# EAGLE board InkTime_v6 (EAGLE 9.7.0)
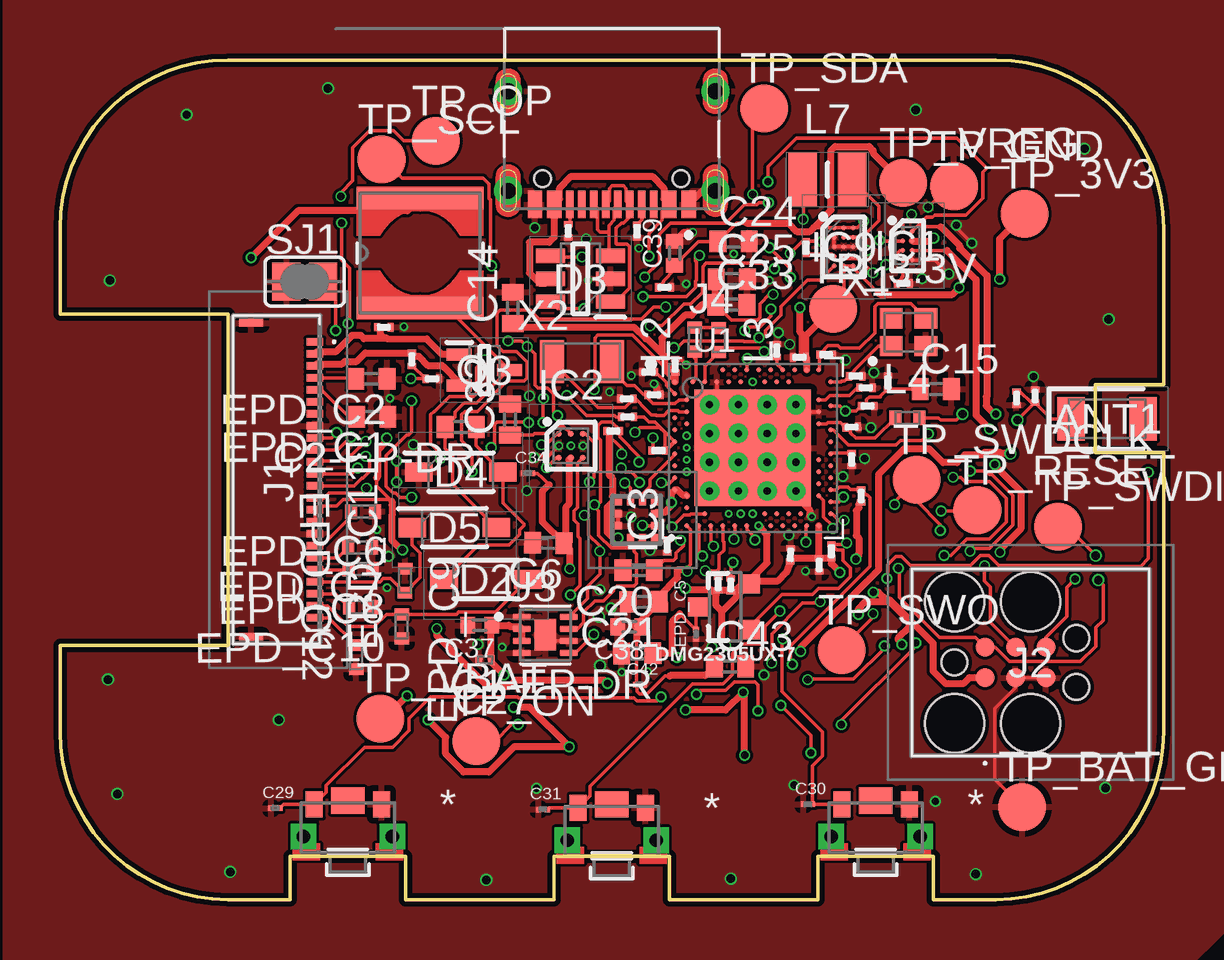
[diagram p0: board, top side]
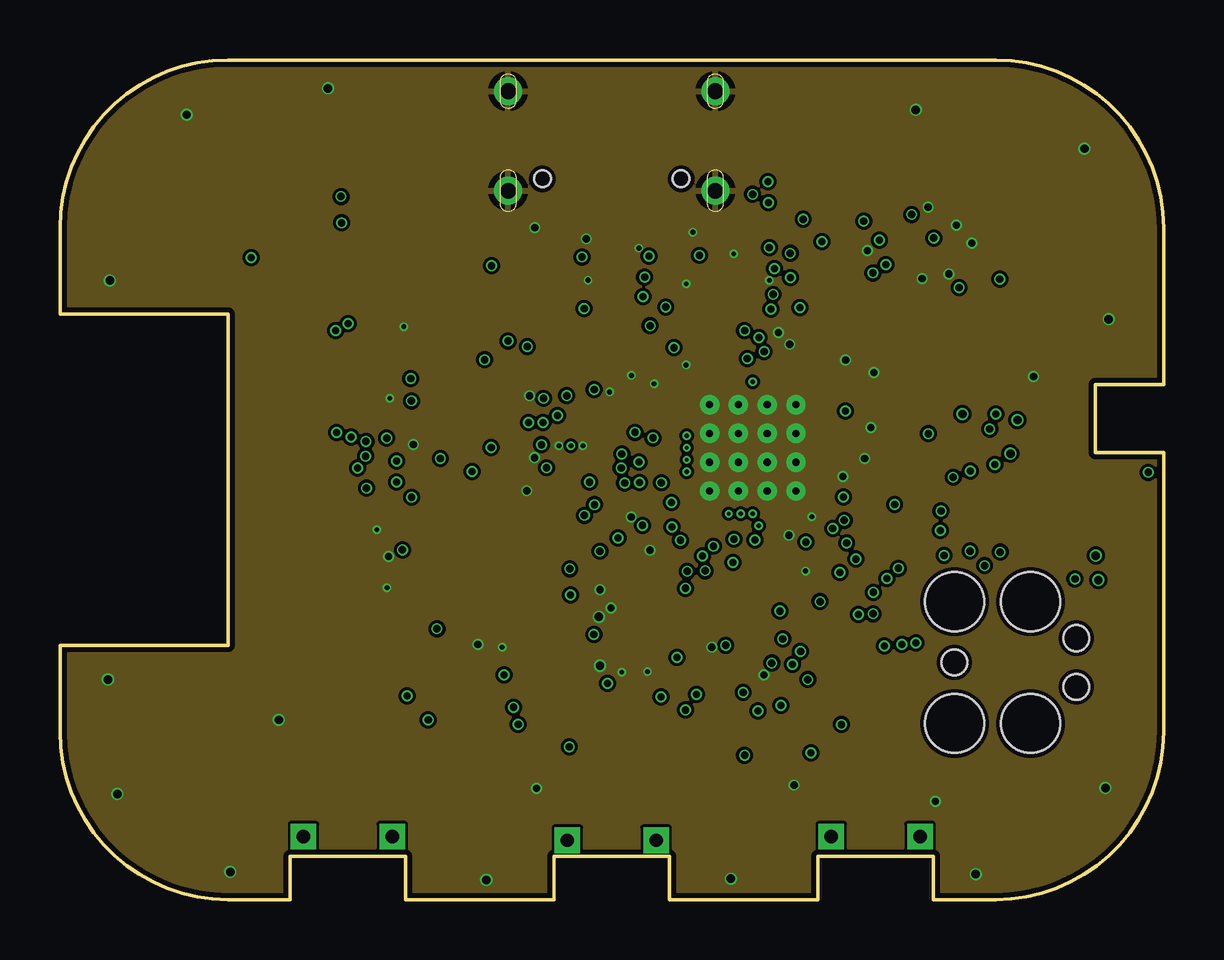
[diagram p1: board, inner layer Route2]
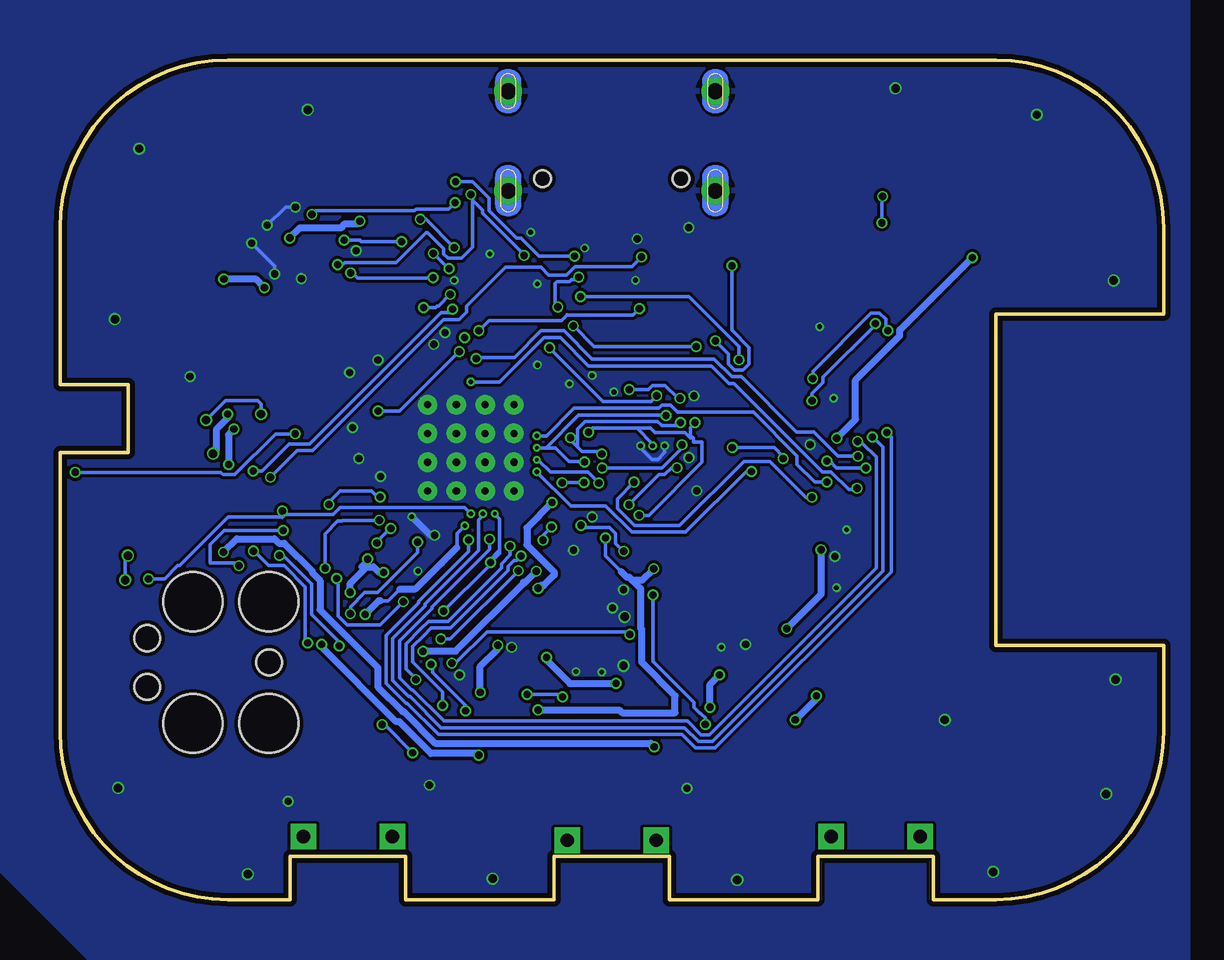
[diagram p2: board, bottom side, seen from below]

Size 46 x 35 mm. Coordinates in mm from the lower left corner, seen from the top.
Outline: 7,35 arc90 0,28 0,24.4 7,24.4 7,10.6 0,10.6 0,7 arc90 7,0 9.6,0 9.6,1.8 14.4,1.8 14.4,0 20.6,0 20.6,1.8 25.4,1.8 25.4,0 31.6,0 31.6,1.8 36.4,1.8 36.4,0 39,0 arc90 46,7 46,18.63 43.15,18.63 43.15,21.46 46,21.46 46,28 arc90 39,35 7,35
Copper layers (1*16): Top 0.035mm / dielectric 1.6mm / Bottom 0.035mm
Design rules "jlcpcb-2layers.dru": minimum track width 5mil, minimum drill 0.3mm, track to track 5mil, track to pad 5mil, pad to pad 5mil, via to via 5mil, smd to smd 5mil, copper to edge 0.2mm, drill to drill 6mil, minimum pad ring 10mil, minimum via ring 3mil, stop-mask expansion 4mil, vias tented up to drill 0mil, thermal gap 10mil

## Footprints (pad centres in the part's own frame; a part is rotated, then mirrored left to right if it is on the bottom)
2450AT18B100E_ANTC3216X140N = smd 1.15 x 1.8: 1 -1.5,0; 2 1.5,0
GRM011R60J152KE01L_1_0201 = smd 0.35 x 0.25: 1 0,0.275; 2 0,-0.275
ESP32_C6_LIBRARY_1_ESP32_WROVER_EAGLE-LTSPICE_C0402 = smd 0.7 x 0.9: 1 -0.65,0; 2 0.65,0
NORDIC_NRF_3_RESC0201_L = smd 0.28 x 0.43: 1 -0.255,0; 2 0.255,0
GRM011R60J152KE01L_2_CAPC0201X13N = smd 0.22 x 0.23: 1 -0.185,0; 2 0.185,0
PERFECT_0402_0402 = smd 0.6 x 0.7: 1 -0.5,0; 2 0.5,0
ESP32_C6_LIBRARY_5_SOD3716X135N = smd 1.15 x 0.8: 1 -1.75,0; 2 1.75,0
ESP32_C6_LIBRARY_3_SOT95P280X145-6N = smd 1.2 x 0.6: 1 -1.25,0.95; 2 -1.25,0; 3 -1.25,-0.95; 4 1.25,-0.95; 5 1.25,0; 6 1.25,0.95
ESP32_C6_LIBRARY_4_ESP32_C6_LIBRARY_4_ESP32_C6_LIBRARY_4_ESP32_C6_LIBRARY_4_ESP32_WROVER_SPARKFUN-DISCRETESEMI_SOT23-3 = smd 0.8 x 0.9: 1 -0.95,-1; 2 0.95,-1; 3 0,1.1
NORDIC_NRF_3_RESC0402_L = smd 0.5 x 0.6: 1 -0.5,0; 2 0.5,0
BQ25180YBGR_BGA8C40P2X4_100X155X50 = smd 0.2 x 0.2: A1 -0.2,0.6; A2 0.2,0.6; B1 -0.2,0.2; B2 0.2,0.2; C1 -0.2,-0.2; C2 0.2,-0.2; D1 -0.2,-0.6; D2 0.2,-0.6
DRV2605YZFR_BGA9C50P3X3_144X144X62 = smd 0.25 x 0.25: A1 -0.5,0.5; A2 0,0.5; A3 0.5,0.5; B1 -0.5,0; B2 0,0; B3 0.5,0; C1 -0.5,-0.5; C2 0,-0.5; C3 0.5,-0.5
BMA423_BMA423 = smd 0.3 x 0.35: 1 -0.75,-0.775; 2 -0.25,-0.775; 3 0.25,-0.775; 4 0.75,-0.775; 7 0.75,0.775; 8 0.25,0.775; 9 -0.25,0.775; 10 -0.75,0.775 | smd 0.35 x 0.3: 5 0.775,-0.25; 6 0.775,0.25; 11 -0.775,0.25; 12 -0.775,-0.25
RT6160AWSC_BGA15C40P3X5_140X230X60 = smd 0.216 x 0.216: A1 -0.4,0.8; A2 0,0.8; A3 0.4,0.8; B1 -0.4,0.4; B2 0,0.4; B3 0.4,0.4; C1 -0.4,0; C2 0,0; C3 0.4,0; D1 -0.4,-0.4; D2 0,-0.4; D3 0.4,-0.4; E1 -0.4,-0.8; E2 0,-0.8; E3 0.4,-0.8
503480-2400_5034802400 = smd 0.3 x 0.7: 1 -5.75,1.525; 2 -5.25,1.525; 3 -4.75,1.525; 4 -4.25,1.525; 5 -3.75,1.525; 6 -3.25,1.525; 7 -2.75,1.525; 8 -2.25,1.525; 9 -1.75,1.525; 10 -1.25,1.525; 11 -0.75,1.525; 12 -0.25,1.525; 13 0.25,1.525; 14 0.75,1.525; 15 1.25,1.525; 16 1.75,1.525; 17 2.25,1.525; 18 2.75,1.525; 19 3.25,1.525; 20 3.75,1.525; 21 4.25,1.525; 22 4.75,1.525; 23 5.25,1.525; 24 5.75,1.525 | smd 0.3 x 1: MP1 -6.54,-1.125; MP2 6.54,-1.125
TC2030-IDC_TC2030IDC = smd 0.783 x 0.783: 1 -0.953,-0.635; 2 -0.953,0.635; 3 0.317,-0.635; 4 0.317,0.635; 5 1.588,-0.635; 6 1.588,0.635 | hole 2.451: -2.223,-2.54; -2.223,2.54; 0.952,-2.54; 0.952,2.54 | hole 1.067: -2.223,0; 2.857,-1.016; 2.857,1.016
KH-TYPE-C-16P_KINGHELM_KH-TYPE-C-16P = smd 0.6 x 1.15: A1_B12 -3.2,4.725; A4_B9 -2.4,4.725; A9_B4 2.4,4.725; A12_B1 3.2,4.725 | smd 0.3 x 1.15: A5 -1.25,4.725; A6 -0.25,4.725; A7 0.25,4.725; A8 1.25,4.725; B5 1.75,4.725; B6 0.75,4.725; B7 -0.75,4.725; B8 -1.75,4.725 | drill 0.65 pad 1.05: SH1 -4.32,0; SH2 4.32,0; SH3 -4.32,4.15; SH4 4.32,4.15 | hole 0.7: -2.89,3.65; 2.89,3.65
NORDIC_NRF_2_RESC0402_L = smd 0.5 x 0.6: 1 -0.5,0; 2 0.5,0
ESP32_C6_LIBRARY_2_IND_4828-WE-TPC_WRE = smd 0.9 x 5.3: 1 -2.286,0; 2 2.286,0
MLP2016SR47MT0S1_INDC2016X100N = smd 1.2 x 2.2: 1 -1.028,0; 2 1.028,0
ESP32_C6_LIBRARY_6_SOT65P210X110-3N = smd 1.05 x 0.5: 1 -1.05,0.65; 2 -1.05,-0.65; 3 1.05,0
CPF0201D7K68C1_0201 = smd 0.35 x 0.25: 1 0,0.275; 2 0,-0.275
ERA-1AEB3401C_0201 = smd 0.35 x 0.25: 1 0,0.275; 2 0,-0.275
ESP32_C6_LIBRARY_7_JUMPER_SJ = smd 1.168 x 1.6: 1 -0.762,0; 2 0.762,0
2025-10-22_07-23-44_LIBRARY_SW_EVP-AKE31A_PAN = smd 0.711 x 1.092: 1 -1.4,-0.972; 2 1.4,-0.972 | drill 0.559 pad 0.914 square: 3 -1.848,0.381; 4 1.848,0.381 | smd 1.397 x 1.092: 5 0,-1.124
HECTOR_WATCH_1_TP20R = smd 2 x 2: TP 0,0
NORDIC_NRF_4_AQFN50P700X700X85_HS-74N = smd 4.85 x 4.85: P$74 0,0 | drill 0.3 pad 0.6: P$75 -1.8,1.8; P$76 -0.6,1.8; P$77 0.6,1.8; P$78 1.8,1.8; P$79 -1.8,0.6; P$80 -0.6,0.6; P$81 0.6,0.6; P$82 1.8,0.6; P$83 -1.8,-0.6; P$84 -0.6,-0.6; P$85 0.6,-0.6; P$86 1.8,-0.6; P$87 -1.8,-1.8; P$88 -0.6,-1.8; P$89 0.6,-1.8; P$90 1.8,-1.8 | smd 0.2 x 0.2: P$A8 -1.25,3.25; P$A10 -0.75,3.25; P$A12 -0.25,3.25; P$A14 0.25,3.25; P$A16 0.75,3.25; P$A18 1.25,3.25; P$A20 1.75,3.25; P$A22 2.25,3.25; P$A23 2.75,3.25; P$AA24 3.25,-2.25; P$AB2 -2.75,-2.5; P$AC5 -2,-2.75; P$AC9 -1,-2.75; P$AC11 -0.5,-2.75; P$AC13 0,-2.75; P$AC15 0.5,-2.75; P$AC17 1,-2.75; P$AC19 1.5,-2.75; P$AC21 2,-2.75; P$AC24 3.25,-2.75; P$AD2 -2.75,-3.25; P$AD4 -2.25,-3.25; P$AD6 -1.75,-3.25; P$AD8 -1.25,-3.25; P$AD10 -0.75,-3.25; P$AD12 -0.25,-3.25; P$AD14 0.25,-3.25; P$AD16 0.75,-3.25; P$AD18 1.25,-3.25; P$AD20 1.75,-3.25; P$AD22 2.25,-3.25; P$AD23 2.75,-3.25; P$B1 -3.25,2.75; P$B3 -2.5,2.75; P$B5 -2,2.75; P$B7 -1.5,2.75; P$B9 -1,2.75; P$B11 -0.5,2.75; P$B13 0,2.75; P$B15 0.5,2.75; P$B17 1,2.75; P$B19 1.5,2.75; P$B24 3.25,2.75; P$C1 -3.25,2.25; P$D2 -2.75,2; P$D23 2.75,2; P$E24 3.25,1.75; P$F2 -2.75,1.5; P$F23 2.75,1.5; P$G1 -3.25,1.25; P$H2 -2.75,1; P$H23 2.75,1; P$J1 -3.25,0.75; P$J24 3.25,0.75; P$K2 -2.75,0.5; P$L1 -3.25,0.25; P$L24 3.25,0.25; P$M2 -2.75,0; P$N1 -3.25,-0.25; P$N24 3.25,-0.25; P$P2 -2.75,-0.5; P$P23 2.75,-0.5; P$R1 -3.25,-0.75; P$R24 3.25,-0.75; P$T2 -2.75,-1; P$T23 2.75,-1; P$U1 -3.25,-1.25; P$U24 3.25,-1.25; P$V23 2.75,-1.5; P$W1 -3.25,-1.75; P$W24 3.25,-1.75; P$Y2 -2.75,-2; P$Y23 2.75,-2
ESP32_C6_LIBRARY_SON50P200X200X80-9N = smd 0.76 x 0.27: 1 -0.985,0.75; 2 -0.985,0.25; 3 -0.985,-0.25; 4 -0.985,-0.75; 5 0.985,-0.75; 6 0.985,-0.25; 7 0.985,0.25; 8 0.985,0.75 | smd 0.9 x 1.3: 9 0,0
NORDIC_NRF_BT-XTAL_2016_N = smd 0.95 x 0.85: 1 -0.725,-0.575; 2 0.725,-0.575; 3 0.725,0.575; 4 -0.725,0.575
NORDIC_NRF_1_XTAL_3215_N = smd 1 x 1.8: 1 -1.25,0; 2 1.25,0

## Placement (x,y rotation side)
ANT1  2450AT18B100E  [2450AT18B100E_ANTC3216X140N]  43.65,20.04 0 top
C1  12pF  [GRM011R60J152KE01L_1_0201]  33.17,21.82 90 top
C1-EP-DR  10uF  [ESP32_C6_LIBRARY_1_ESP32_WROVER_EAGLE-LTSPICE_C0402]  24.06,10.26 180.2 top
C2  12pF  [GRM011R60J152KE01L_1_0201]  31.94,22.72 90 top
C2-EP-DR  4.7uF/50V  [ESP32_C6_LIBRARY_1_ESP32_WROVER_EAGLE-LTSPICE_C0402]  16.7,19.7 180 top
C3  1pF  [GRM011R60J152KE01L_1_0201]  33,19.7 91.9 top
C4  1pF  [GRM011R60J152KE01L_1_0201]  40.64,20.99 180 top
C5  100nF  [GRM011R60J152KE01L_1_0201]  24.53,21.99 90 top
C6  4.7uF  [ESP32_C6_LIBRARY_1_ESP32_WROVER_EAGLE-LTSPICE_C0402]  20.35,14.87 179.1 top
C7  100nF  [GRM011R60J152KE01L_1_0201]  30.45,14.37 178 top
C8  100nF  [GRM011R60J152KE01L_1_0201]  31.64,13.95 0 top
C9  820pF  [GRM011R60J152KE01L_1_0201]  33,18.35 0 top
C10  N.C  [GRM011R60J152KE01L_1_0201]  33.67,20.57 270 top
C11  100pF  [GRM011R60J152KE01L_1_0201]  33.6,21.34 269.1 top
C12  100nF  [GRM011R60J152KE01L_1_0201]  30.82,22.61 90 top
C13  N.C  [GRM011R60J152KE01L_1_0201]  29.88,22.88 0 top
C14  4.7uF  [ESP32_C6_LIBRARY_1_ESP32_WROVER_EAGLE-LTSPICE_C0402]  18.88,24.66 89.8 top
C15  1.0uF  [ESP32_C6_LIBRARY_1_ESP32_WROVER_EAGLE-LTSPICE_C0402]  36.5,21.28 0 top
C16  47nF  [GRM011R60J152KE01L_1_0201]  34.51,21.56 0 top
C17  12pF  [GRM011R60J152KE01L_1_0201]  24.76,21.05 270 top
C18  12pF  [GRM011R60J152KE01L_1_0201]  23.63,20.88 90 top
C19  100nF  [GRM011R60J152KE01L_1_0201]  25.64,22.25 0 top
C20  4.7uF  [ESP32_C6_LIBRARY_1_ESP32_WROVER_EAGLE-LTSPICE_C0402]  24.12,13.73 180 top
C21  4.7uF  [ESP32_C6_LIBRARY_1_ESP32_WROVER_EAGLE-LTSPICE_C0402]  24.33,12.41 180.5 top
C22  N.C  [GRM011R60J152KE01L_1_0201]  39.87,20.9 0 top
C23  0.1uF  [GRM011R60J152KE01L_1_0201]  25.2,25.52 270 top
C24  10uF  [ESP32_C6_LIBRARY_1_ESP32_WROVER_EAGLE-LTSPICE_C0402]  28.08,27.43 0 top
C25  22uF  [ESP32_C6_LIBRARY_1_ESP32_WROVER_EAGLE-LTSPICE_C0402]  28.01,25.86 0 top
C27  0.1uF  [NORDIC_NRF_3_RESC0201_L]  17.72,9.99 179.6 top
C29  1uF  [GRM011R60J152KE01L_2_CAPC0201X13N]  8.98,3.81 0 top
C30  1uF  [GRM011R60J152KE01L_2_CAPC0201X13N]  31.18,3.97 0 top
C31  1uF  [GRM011R60J152KE01L_2_CAPC0201X13N]  20.13,3.76 0 top
C32  1uF  [ESP32_C6_LIBRARY_1_ESP32_WROVER_EAGLE-LTSPICE_C0402]  18.76,20.01 90 top
C33  22uF  [ESP32_C6_LIBRARY_1_ESP32_WROVER_EAGLE-LTSPICE_C0402]  27.98,24.8 0 top
C34  0.1uF  [GRM011R60J152KE01L_2_CAPC0201X13N]  19.51,17.77 0 top
C37  1uF  [PERFECT_0402_0402]  17.5,11.44 180 top
C38  1uF  [PERFECT_0402_0402]  23.75,11.37 180 top
C39  10uF  [PERFECT_0402_0402]  25.62,26.93 90 top
C42  0.1uF  [GRM011R60J152KE01L_2_CAPC0201X13N]  24.17,8.96 0 top
C43  4.7uF  [ESP32_C6_LIBRARY_1_ESP32_WROVER_EAGLE-LTSPICE_C0402]  27.93,9.72 0 top
D2  MBR0530  [ESP32_C6_LIBRARY_5_SOD3716X135N]  17.76,13.35 0 top
D3  USBLC6-2SC6Y  [ESP32_C6_LIBRARY_3_SOT95P280X145-6N]  21.69,25.88 180 top
D4  MBR0530  [ESP32_C6_LIBRARY_5_SOD3716X135N]  16.71,17.82 0 top
D5  MBR0530  [ESP32_C6_LIBRARY_5_SOD3716X135N]  16.44,15.51 0.2 top
DMG2305UX-7  20V/4.2A/52mΩ/1.4W  [ESP32_C6_LIBRARY_4_ESP32_C6_LIBRARY_4_ESP32_C6_LIBRARY_4_ESP32_C6_LIBRARY_4_ESP32_WROVER_SPARKFUN-DISCRETESEMI_SOT23-3]  27.73,12.2 90 top
EPD_C1  1uF/50V  [ESP32_C6_LIBRARY_1_ESP32_WROVER_EAGLE-LTSPICE_C0402]  13.02,20.13 180 top
EPD_C2  1uF/50V  [ESP32_C6_LIBRARY_1_ESP32_WROVER_EAGLE-LTSPICE_C0402]  12.98,21.7 180 top
EPD_C5  0.1uF/50V  [GRM011R60J152KE01L_2_CAPC0201X13N]  26.51,11.06 90 top
EPD_C6  1uF/50V  [NORDIC_NRF_3_RESC0402_L]  12.63,16.17 180 top
EPD_C7  1uF/50V  [NORDIC_NRF_3_RESC0402_L]  12.5,14.68 180 top
EPD_C8  1uF/50V  [NORDIC_NRF_3_RESC0402_L]  12.53,13.78 180.4 top
EPD_C9  1uF/50V  [NORDIC_NRF_3_RESC0402_L]  14.38,13.29 269.2 top
EPD_C10  1uF/50V  [NORDIC_NRF_3_RESC0402_L]  12.55,12.19 180.6 top
EPD_C11  1uF/50V  [NORDIC_NRF_3_RESC0402_L]  14.25,11.39 90 top
EPD_C12  1uF/50V  [NORDIC_NRF_3_RESC0402_L]  12.34,10.11 90.9 top
IC1  BQ25180YBGR  [BQ25180YBGR_BGA8C40P2X4_100X155X50]  35.33,27.26 0 top
IC2  DRV2605YZFR  [DRV2605YZFR_BGA9C50P3X3_144X144X62]  21.3,18.92 0 top
IC3  BMA423  [BMA423_BMA423]  24.04,15.83 90 top
IC9  RT6160AWSC  [RT6160AWSC_BGA15C40P3X5_140X230X60]  32.67,27.21 0 top
J1  503480-2400  [503480-2400_5034802400]  9.1,17.5 270 top
J2  TC2030-IDC  [TC2030-IDC_TC2030IDC]  39.51,9.88 0 top
J4  KH-TYPE-C-16P  [KH-TYPE-C-16P_KINGHELM_KH-TYPE-C-16P]  23,33.7 180 top
L2  10uH  [NORDIC_NRF_2_RESC0402_L]  26.46,23.34 89.7 top
L3  15nH  [NORDIC_NRF_2_RESC0402_L]  27.46,23.33 270 top
L4  3.9nH  [NORDIC_NRF_2_RESC0402_L]  35.32,20.08 0 top
L5  68uH  [ESP32_C6_LIBRARY_2_IND_4828-WE-TPC_WRE]  15.01,26.95 90 top
L7  FTC252012SR47MBCA  [MLP2016SR47MT0S1_INDC2016X100N]  31.99,30.01 180 top
Q3  SI1308EDL-T1-GE3  [ESP32_C6_LIBRARY_6_SOT65P210X110-3N]  17.69,22.07 0 top
R1_EP_DR  0.47  [CPF0201D7K68C1_0201]  14.66,22.52 180 top
R1_USB  5K1  [CPF0201D7K68C1_0201]  24.05,27.86 180 top
R2  0  [CPF0201D7K68C1_0201]  23.65,20.12 90 top
R2_EP_DR  10K  [CPF0201D7K68C1_0201]  13.5,23.86 269.3 top
R2_USB  5K1  [CPF0201D7K68C1_0201]  21.18,27.87 359.9 top
R3  0  [CPF0201D7K68C1_0201]  25.31,14.73 359.7 top
R4  0  [CPF0201D7K68C1_0201]  31.09,27.18 180 top
R5  10k  [CPF0201D7K68C1_0201]  27.44,13.16 0 top
R7  10k  [CPF0201D7K68C1_0201]  33.39,16.82 0 top
R8  10k  [CPF0201D7K68C1_0201]  27.96,13.12 0 top
R9  10K  [ERA-1AEB3401C_0201]  35.15,25.68 270.2 top
R17  3k3  [CPF0201D7K68C1_0201]  23.06,19.53 90 top
R18  3K3  [CPF0201D7K68C1_0201]  24.94,18.72 90 top
R_PWR_EPD  10K  [CPF0201D7K68C1_0201]  32.16,14.52 0 top
R_TYPE_SEL  2.2  [CPF0201D7K68C1_0201]  15.52,21.71 270.1 top
SJ1  [ESP32_C6_LIBRARY_7_JUMPER_SJ]  10.2,25.76 0 top
SW_DN  2025-10-22_07-23-44_LIBRARY_EVP-AKE31ASW_EVP-AKE31A_PAN  [2025-10-22_07-23-44_LIBRARY_SW_EVP-AKE31A_PAN]  12,3 180 top
SW_ENT  2025-10-22_07-23-44_LIBRARY_EVP-AKE31ASW_EVP-AKE31A_PAN  [2025-10-22_07-23-44_LIBRARY_SW_EVP-AKE31A_PAN]  23,2.85 180 top
SW_UP  2025-10-22_07-23-44_LIBRARY_EVP-AKE31ASW_EVP-AKE31A_PAN  [2025-10-22_07-23-44_LIBRARY_SW_EVP-AKE31A_PAN]  34,3 180 top
TP_3.3V  HECTOR_WATCH_1_TPTP20R  [HECTOR_WATCH_1_TP20R]  32.22,24.63 0 top
TP_3V3  HECTOR_WATCH_1_TPTP20R  [HECTOR_WATCH_1_TP20R]  40.2,28.58 0 top
TP_BAT_GND  HECTOR_WATCH_1_TPTP20R  [HECTOR_WATCH_1_TP20R]  40.11,3.86 0 top
TP_GND  HECTOR_WATCH_1_TPTP20R  [HECTOR_WATCH_1_TP20R]  37.27,29.74 0 top
TP_ON  HECTOR_WATCH_1_TPTP20R  [HECTOR_WATCH_1_TP20R]  17.35,6.6 0 top
TP_OP  HECTOR_WATCH_1_TPTP20R  [HECTOR_WATCH_1_TP20R]  15.66,31.63 0 top
TP_RESET  HECTOR_WATCH_1_TPTP20R  [HECTOR_WATCH_1_TP20R]  38.24,16.23 0 top
TP_SCL  HECTOR_WATCH_1_TPTP20R  [HECTOR_WATCH_1_TP20R]  13.41,30.85 0 top
TP_SDA  HECTOR_WATCH_1_TPTP20R  [HECTOR_WATCH_1_TP20R]  29.35,32.99 0 top
TP_SWDCLK  HECTOR_WATCH_1_TPTP20R  [HECTOR_WATCH_1_TP20R]  35.71,17.51 0 top
TP_SWDIO  HECTOR_WATCH_1_TPTP20R  [HECTOR_WATCH_1_TP20R]  41.6,15.55 0 top
TP_SWO  HECTOR_WATCH_1_TPTP20R  [HECTOR_WATCH_1_TP20R]  32.59,10.4 0 top
TP_VBAT  HECTOR_WATCH_1_TPTP20R  [HECTOR_WATCH_1_TP20R]  13.36,7.55 0 top
TP_VREG  HECTOR_WATCH_1_TPTP20R  [HECTOR_WATCH_1_TP20R]  35.14,29.87 0 top
U1  NRF52840_QF  [NORDIC_NRF_4_AQFN50P700X700X85_HS-74N]  28.88,18.83 0 top
U3  MAX17048G+T10  [ESP32_C6_LIBRARY_SON50P200X200X80-9N]  20.23,11.04 0 top
X1  32Mhz  [NORDIC_NRF_BT-XTAL_2016_N]  35.37,23.65 0 top
X2  32.786kHz  [NORDIC_NRF_1_XTAL_3215_N]  21.75,22.43 0 top

## Library data of the parts
ANT1 = InkTime_v5; ARROW_PART_NUMBER: 2450AT18B100E; ARROW_PRICE-STOCK: https://www.arrow.com/en/products/2450at18b100e/johanson-dielectrics?utm_currency=USD&region=nac; DESCRIPTION: Antennas 2.45GHz ANTENNA; HEIGHT: 1.4mm; MANUFACTURER_NAME: JOHANSON TECHNOLOGY; MANUFACTURER_PART_NUMBER: 2450AT18B100E; MOUSER_PART_NUMBER: 609-2450AT18B100E; MOUSER_PRICE-STOCK: https://www.mouser.co.uk/ProductDetail/Johanson-Technology/2450AT18B100E?qs=yCnrNFeXz%252Bh5MFsFIXGZGA%3D%3D
C1-C5 C7-C13 C16-C19 C22 C23 C27 C37-C39 EPD_C6-EPD_C12 L2-L4 R1_EP_DR R1_USB R2 R2_EP_DR R2_USB R3-R5 R7-R9 R17 R18 R_PWR_EPD R_TYPE_SEL SJ1 TP_3.3V TP_3V3 TP_BAT_GND TP_GND TP_ON TP_OP TP_RESET TP_SCL TP_SDA TP_SWDCLK TP_SWDIO TP_SWO TP_VBAT TP_VREG U1 X1 X2 = InkTime_v5
C1-EP-DR C2-EP-DR C6 C14 C15 C20 C21 C24 C25 C32 C33 C43 EPD_C1 EPD_C2 = InkTime_v5; SPICEMODEL: NONE; SPICEPREFIX: C
C29-C31 C34 C42 EPD_C5 = InkTime_v5; AVAILABILITY: In Stock; CHECK_PRICES: https://www.snapeda.com/parts/GRM011R60J152KE01L/Murata/view-part/?ref=eda; DESCRIPTION: SMD Capacitor X5R(EIA) with Capacitance: 1500pF Tol. 10%. Rated Voltage: 6.3Vdc; MF: Murata; MP: GRM011R60J152KE01L; PACKAGE: 0201 Murata; PRICE: None; SNAPEDA_LINK: https://www.snapeda.com/parts/GRM011R60J152KE01L/Murata/view-part/?ref=snap
D2 D4 D5 = InkTime_v5; AVAILABILITY: In Stock; CHECK_PRICES: https://www.snapeda.com/parts/MBR0530/Onsemi/view-part/?ref=eda; DESCRIPTION: Diode Schottky 30 V 500mA Surface Mount SOD-123; MF: ON Semiconductor; MP: MBR0530; PACKAGE: SOD-123-2 ON Semiconductor; PRICE: None; PURCHASE-URL: https://www.snapeda.com/api/url_track_click_mouser/?unipart_id=179458&manufacturer=ON Semiconductor&part_name=MBR0530&search_term=None; SNAPEDA_LINK: https://www.snapeda.com/parts/MBR0530/Onsemi/view-part/?ref=snap
D3 = InkTime_v5; AVAILABILITY: In Stock; CHECK_PRICES: https://www.snapeda.com/parts/USBLC6-2SC6Y/STMicroelectronics/view-part/?ref=eda; DESCRIPTION: 17V Clamp 5A (8/20µs) Ipp Tvs Diode Surface Mount SOT-23-6; MF: STMicroelectronics; MP: USBLC6-2SC6Y; PACKAGE: SOT-23-6 STMicroelectronics; PRICE: None; SNAPEDA_LINK: https://www.snapeda.com/parts/USBLC6-2SC6Y/STMicroelectronics/view-part/?ref=snap
DMG2305UX-7 = InkTime_v5; PROD_ID: TRAN-14388
IC1 = InkTime_v5; ARROW_PART_NUMBER: BQ25180YBGR; ARROW_PRICE-STOCK: https://www.arrow.com/en/products/bq25180ybgr/texas-instruments?utm_currency=USD&region=nac; DESCRIPTION: Charger IC Lithium Ion/Polymer, Lithium Iron Phosphate 8-DSBGA (1.6x1.1); HEIGHT: 0.5mm; MANUFACTURER_NAME: Texas Instruments; MANUFACTURER_PART_NUMBER: BQ25180YBGR; MOUSER_PART_NUMBER: 595-BQ25180YBGR; MOUSER_PRICE-STOCK: https://www.mouser.co.uk/ProductDetail/Texas-Instruments/BQ25180YBGR?qs=doiCPypUmgEWjAK%252BJAX6Tw%3D%3D
IC2 = InkTime_v5; ARROW_PART_NUMBER: DRV2605YZFR; ARROW_PRICE-STOCK: https://www.arrow.com/en/products/drv2605yzfr/texas-instruments?region=nac; DESCRIPTION: Haptic Driver for ERM/LRA with Built-In Library and Smart Loop Architecture; HEIGHT: 0.625mm; MANUFACTURER_NAME: Texas Instruments; MANUFACTURER_PART_NUMBER: DRV2605YZFR
IC3 = InkTime_v5; ARROW_PART_NUMBER: BMA423; ARROW_PRICE-STOCK: https://www.arrow.com/en/products/bma423/bosch; DESCRIPTION: Accelerometers Triaxial low-g 12bit Acceleration Sensor; HEIGHT: 1mm; MANUFACTURER_NAME: BOSCH; MANUFACTURER_PART_NUMBER: BMA423; MOUSER_PART_NUMBER: 262-BMA423; MOUSER_PRICE-STOCK: https://www.mouser.co.uk/ProductDetail/Bosch-Sensortec/BMA423?qs=HXFqYaX1Q2xC%252BSgeGoX3mg%3D%3D
IC9 = InkTime_v5; DESCRIPTION: Buck-Boost Regulator Positive Output Step-Up/Step-Down I2C DC-DC Controller IC 15-WL-CSP (BSC) (1.4x2.3); HEIGHT: 0.6mm; MANUFACTURER_NAME: RICHTEK; MANUFACTURER_PART_NUMBER: RT6160AWSC; MOUSER_PART_NUMBER: 835-RT6160AWSC; MOUSER_PRICE-STOCK: https://www.mouser.co.uk/ProductDetail/Richtek/RT6160AWSC?qs=amGC7iS6iy%2FLd9PSoixZXQ%3D%3D
J1 = InkTime_v5; DESCRIPTION: FFC & FPC Connectors 0.5mm FPC RA SMT Dual Contact 24Ckt; HEIGHT: 1.87mm; MANUFACTURER_NAME: Molex; MANUFACTURER_PART_NUMBER: 503480-2400; MOUSER_PART_NUMBER: 538-503480-2400; MOUSER_PRICE-STOCK: https://www.mouser.co.uk/ProductDetail/Molex/503480-2400?qs=OAhjpuo3Vu7efIoxFh9AOw%3D%3D
J2 = InkTime_v5; DESCRIPTION: CABLE ADAPTER 6 POS; HEIGHT: 19mm; MANUFACTURER_NAME: Tag Connect; MANUFACTURER_PART_NUMBER: TC2030-IDC
J4 = InkTime_v5; AVAILABILITY: Not in stock; CHECK_PRICES: https://www.snapeda.com/parts/KH-TYPE-C-16P/Kinghelm/view-part/?ref=eda; MF: kinghelm; MP: KH-TYPE-C-16P; PACKAGE: None; PRICE: None; SNAPEDA_LINK: https://www.snapeda.com/parts/KH-TYPE-C-16P/Kinghelm/view-part/?ref=snap
L5 = InkTime_v5; COPYRIGHT: Copyright (C) 2024 Ultra Librarian. All rights reserved.; MANUFACTURER_PART_NUMBER: 744043680; MFR_NAME: Wurth Electronics
L7 = InkTime_v5; DESCRIPTION: SMD / SMT Inductors (Coils), L=0.47?H, L x W x T :; HEIGHT: 1mm; JLCPCB: https://jlcpcb.com/partdetail/6763488-FTC252012SR47MBCA/C5832368; MANUFACTURER_NAME: TDK; MANUFACTURER_PART_NUMBER: FTC252012SR47MBCA
Q3 = InkTime_v5; AVAILABILITY: In Stock; CHECK_PRICES: https://www.snapeda.com/parts/SI1308EDL-T1-GE3/Vishay+Siliconix/view-part/?ref=eda; DESCRIPTION: Si1308EDL-T1-GE3 N-channel MOSFET Transistor, 1.5 A, 30 V, 3-Pin SC-70 | Siliconix / Vishay SI1308EDL-T1-GE3; MF: Vishay Siliconix; MP: SI1308EDL-T1-GE3; PACKAGE: SOT-323 Vishay Semiconductor; PRICE: None; PURCHASE-URL: https://www.snapeda.com/api/url_track_click_mouser/?unipart_id=274603&manufacturer=Vishay Siliconix&part_name=SI1308EDL-T1-GE3&search_term=None; SNAPEDA_LINK: https://www.snapeda.com/parts/SI1308EDL-T1-GE3/Vishay+Siliconix/view-part/?ref=snap
SW_DN SW_ENT SW_UP = InkTime_v5; COPYRIGHT: Copyright (C) 2025 Ultra Librarian. All rights reserved.; DIGI-KEY_PART_NUMBER_1: P123437TR-ND; DIGI-KEY_PART_NUMBER_2: P123437CT-ND; DIGI-KEY_PART_NUMBER_3: P123437DKR-ND; MANUFACTURER_NAME: Panasonic; MANUFACTURER_PART_NUMBER: EVP-AKE31A
U3 = InkTime_v5; AVAILABILITY: In Stock; CHECK_PRICES: https://www.snapeda.com/parts/MAX17048G+T10/Analog+Devices/view-part/?ref=eda; DESCRIPTION: 3µA 1-Cell/2-Cell Fuel Gauge with ModelGauge; MF: Analog Devices; MP: MAX17048G+T10; PACKAGE: TDFN-8 Maxim; PRICE: None; PURCHASE-URL: https://www.snapeda.com/api/url_track_click_mouser/?unipart_id=329239&manufacturer=Analog Devices&part_name=MAX17048G+T10&search_term=None; SNAPEDA_LINK: https://www.snapeda.com/parts/MAX17048G+T10/Analog+Devices/view-part/?ref=snap

## Nets
3V3: C6.1 C7.1 C8.1 C12.2 C14.1 C19.2 C25.1 C33.1 C34.2 DMG2305UX-7.2 IC2.C2 IC3.3 IC3.7 IC3.10 IC9.E2 IC9.E3 J2.1 R5.2 R7.2 R8.2 R17.1 R18.1 R_PWR_EPD.2 TP_3.3V.TP TP_3V3.TP U1.P$A22 U1.P$AD14 U1.P$AD23 U1.P$B1 U1.P$W1 U1.P$Y2
ALERT: U1.P$J24 U3.5
D+: D3.4 U1.P$AD6
D-: D3.6 U1.P$AD4
DN: D3.1 J4.A7 J4.B7
DP: D3.3 J4.A6 J4.B6
EPD_3V3: C1-EP-DR.1 DMG2305UX-7.3 EPD_C5.2 J1.15 J1.16 L5.2
EPD_BUSY: J1.9 U1.P$AD12
EPD_CS: J1.12 U1.P$K2
EPD_DC: J1.11 U1.P$AD10
EPD_RST: J1.10 U1.P$AC11
GDR: J1.2 Q3.1 R2_EP_DR.2
GND: C1-EP-DR.2 C1.2 C2.2 C3.2 C4.2 C5.1 C6.2 C7.2 C8.2 C9.2 C10.1 C11.1 C12.1 C13.1 C14.2 C15.2 C16.1 C17.1 C18.1 C19.1 C20.2 C21.2 C22.2 C23.1 C24.2 C25.2 C27.2 C29.1 C30.1 C31.1 C32.2 C33.2 C34.1 C37.2 C38.2 C39.2 C42.2 C43.2 D3.2 D4.1 EPD_C1.1 EPD_C2.1 EPD_C5.1 EPD_C6.1 EPD_C7.1 EPD_C8.1 EPD_C9.1 EPD_C10.1 EPD_C11.1 EPD_C12.1 IC1.D2 IC2.B1 IC2.B3 IC3.8 IC3.9 IC9.B1 IC9.C1 IC9.C2 IC9.C3 J1.8 J1.17 J1.MP1 J1.MP2 J2.3 J2.5 J4.A1_B12 J4.A12_B1 J4.SH1 J4.SH2 J4.SH3 J4.SH4 R1_USB.1 R2_EP_DR.1 R2_USB.2 R3.2 R9.1 R_TYPE_SEL.1 SJ1.1 SW_DN.1 SW_ENT.1 SW_UP.1 TP_BAT_GND.TP TP_GND.TP U1.P$74 U1.P$75 U1.P$76 U1.P$77 U1.P$78 U1.P$79 U1.P$80 U1.P$81 U1.P$82 U1.P$83 U1.P$84 U1.P$85 U1.P$86 U1.P$87 U1.P$88 U1.P$89 U1.P$90 U1.P$B7 U1.P$F23 U3.1 U3.4 U3.6 U3.9 X1.2
HAPTIC_EN: IC2.A1 U1.P$U1
IMU_INT1: IC3.5 U1.P$N1
IMU_INT2: IC3.6 U1.P$P2
LX1: IC9.B2 IC9.B3 L7.1
LX2: IC9.D2 IC9.D3 L7.2
MOSI: J1.14 U1.P$B13
N$1: L2.2 L3.1
N$2: C32.1 IC2.A2
N$3: IC1.D1 R9.2
N$4: J4.B5 R2_USB.1
N$5: J4.A5 R1_USB.2
N$7: C2-EP-DR.2 D5.2 L5.1 Q3.3
N$8: IC9.E1 R2.1
N$9: IC9.D1 R4.1
N$10: IC3.1 R3.1
N$11: EPD_C2.2 J1.4
N$12: EPD_C1.2 J1.5
N$14: C2-EP-DR.1 D2.1 D4.2
N$16: C9.1 U1.P$N24
N$19: C3.1 L4.1 U1.P$H23
N$20: ANT1.1 C4.1 C22.1 L4.2
N$21: C11.2 U1.P$D23
N$22: C1.1 U1.P$B24 X1.1
N$23: C2.1 U1.P$A23 X1.3
N$24: C10.2 C15.1 C16.2 L3.2 U1.P$B5 U1.P$E24
N$25: EPD_C6.2 J1.18
N$26: EPD_C7.2 J1.19
N$27: EPD_C8.2 J1.20
N$28: C13.2 U1.P$A18
N$29: R1_EP_DR.1 R_TYPE_SEL.2 SJ1.2
N$30: EPD_C10.2 J1.22
N$32: EPD_C12.2 J1.24
N$40: L2.1 U1.P$B3
N$41: C5.2 U1.P$C1
N$42: C17.2 U1.P$D2 X2.2
N$43: C18.2 U1.P$F2 X2.1
N$56: C20.1 U1.P$AC5
OUT+: IC2.A3 TP_OP.TP
OUT-: IC2.C3 TP_ON.TP
P0.04: U1.P$J1
P0.09: U1.P$L24
P0.13: C30.2 R5.1 SW_UP.2 U1.P$AD8
P0.14: C31.2 R8.1 SW_ENT.2 U1.P$AC9
P0.19: U1.P$AC15
P0.20: U1.P$AD16
P0.21: U1.P$AC17
P0.22: U1.P$AD18
P0.23: U1.P$AC19
P0.24: U1.P$AD20
P0.25: U1.P$AC21
P0.26: U1.P$G1
P0.27: U1.P$H2
P0.28: U1.P$B11
P0.29: U1.P$A10
P0.30: U1.P$B9
P0.31: U1.P$A8
P1.01: DMG2305UX-7.1 R_PWR_EPD.1 U1.P$Y23
P1.02: C29.2 R7.1 SW_DN.2 U1.P$W24
P1.03: U1.P$V23
P1.04: U1.P$U24
P1.05: U1.P$T23
P1.06: U1.P$R24
P1.07: U1.P$P23
P1.09: U1.P$R1
P1.10: U1.P$A20
P1.11: U1.P$B19
P1.12: U1.P$B17
P1.13: U1.P$A16
P1.14: U1.P$B15
P1.15: U1.P$A14
PMIC_INT: IC1.A1 U1.P$T2
PREVGH: D5.1 EPD_C9.2 J1.21
PREVGL: D2.2 EPD_C11.2 J1.23
RESE: J1.3 Q3.2 R1_EP_DR.2
RESET: J2.6 TP_RESET.TP U1.P$AC13
S$1: X1.4
SCK: J1.13 U1.P$A12
SCL: IC1.B1 IC2.C1 IC3.12 R4.2 R17.2 TP_SCL.TP U1.P$M2 U3.7
SDA: IC1.C1 IC2.B2 IC3.2 R2.2 R18.2 TP_SDA.TP U1.P$L1 U3.8
SWDCLK: J2.4 TP_SWDCLK.TP U1.P$AA24
SWDIO: J2.2 TP_SWDIO.TP U1.P$AC24
SWO: TP_SWO.TP U1.P$AD22
VBAT: C27.1 C37.1 IC1.C2 TP_VBAT.TP U3.2 U3.3
VBUS: C21.1 C38.1 C42.1 C43.1 D3.5 IC1.A2 J4.A4_B9 J4.A9_B4 U1.P$AD2
VREG: C23.2 C24.1 C39.1 IC1.B2 IC9.A1 IC9.A2 IC9.A3 TP_VREG.TP

## Tracks (layer width: path | path; a pad name or v marks a point on that pad's centre or on a via)
3V3  (via drill 0.2, 0.3)
  Top 0.15: v24.72,19.25 24.72,18.77 R18.1 | v23.42,18.57 23.42,18.8 22.79,19.43 R17.1 | U1.P$B1 25.15,22.06 25.15,22.24 23.86,23.53 22.42,23.53 22.3,23.41 22.3,21.29 v22.27,21.26 | v29.73,25.23 29.58,25.23 29.18,24.83 29.18,24.27 29.06,24.15 27.98,24.15 C33.1 | 32.67,25.08 IC9.E2 IC9.E3 33.07,26.33 34.09,25.31 34.11,25.31 | IC3.7 | 20.39,17.3 20.12,17.57 20.11,17.57 19.91,17.77 C34.2 | v20.15,20.9 20.14,20.88 v20.14,19.89
  Top 0.3: U1.P$B1 25.64,21.59 C19.2 25.49,22.12 25.35,22.12 25.19,22.29 25.19,22.66 25.09,22.77 | C12.2 31.13,22.58 U1.P$A22 | C8.1 31.63,14.24 U1.P$AD23 | C8.1 31.66,14.25 R_PWR_EPD.2 32.16,14 v32.52,13.64 | C8.1 30.44,14.22 C7.1 30.29,13.66 29.9,13.26 28.7,13.26 | U1.P$Y2 26.09,16.87 25.95,16.87 25.74,17.08 U1.P$W1 25.49,16.94 v25.49,16.55 25.49,16.42 25.22,16.15 24.89,16.15 IC3.3 | J2.1 37.9,9.24 37.65,9 36.92,9 36.4,9.51 36.4,10.68 34.6,12.49 34.45,12.49 34.12,12.81 v33.9,12.81 | C25.1 27.33,25.83 C33.1 26.76,24.8 26.32,24.36 26.05,24.36 25.09,23.41 25.09,22.77 | C6.1 20.11,15.75 20.11,17.02 20.39,17.3 | IC3.7 23.03,16.82 23.03,17.57 22.89,17.7 22.89,19.43 R17.1 | U1.P$AD14 29.25,15.46 29.25,15.43 29.48,15.2 29.48,14.04 28.7,13.26 | 28.01,12.84 R8.2 | 28.7,13.26 28.52,13.26 28.11,12.84 28.01,12.84 | 28.01,12.84 27.97,12.89 R5.2 | R7.2 33.35,16.55 33.31,16.5 33.31,16.33 33.19,16.21 33.19,15.18 33.29,15.07 33.29,14.4 33.28,14.39 33.28,14.3 v33.18,14.19 | DMG2305UX-7.2 27.59,12.02 | 25.09,22.77 24.48,23.38 24.42,23.38 23.95,23.85 19.04,23.85 C14.1 | C12.2 31.09,23.5 TP_3.3V.TP 32.67,25.08 | C12.2 30.95,22.76 30.95,23.55 30.84,23.65 v30.84,24.68 | v33.28,11.88 33.28,12.12 33.58,12.42 34.58,12.42 35.38,11.61 35.38,11.35 34.94,10.9 34.94,10.84 35.1,10.68 v35.1,10.64 | v39.17,25.86 39.17,27.55 TP_3V3.TP | v26.07,7.9 27.74,7.9 v28.48,8.64 28.54,8.58 v28.54,6.02 | IC3.10 23.19,15.15 22.97,15.15 22.81,15.31 22.81,16.34 23.06,16.59 IC3.7 | IC2.C2 21.22,18.34 21.22,16.48 21.08,16.34 21.08,14.93 C6.1 | v26.07,12.97 26.13,12.91 27.16,12.91 27.35,12.72 27.35,12.26 27.59,12.02
  Top 0.3: 34.11,25.31 34.19,25.23 37.2,25.23 v37.48,25.51 | 27.59,12.02 27.59,10.82 27.67,10.73 27.67,10.68 v27.75,10.6 | v21.25,13.79 21.25,14.61 C6.1
  Bottom 0.15: U1.P$AD14 29.45,15.26 29.45,14.67 | 30.09,14.03 30.1,14.03 | 24.44,18.87 24.23,18.67 23.52,18.67 v23.42,18.57 | 24.44,18.87 24.77,19.2 v24.72,19.25 | 24.44,18.87 24.44,19.61 24.12,19.93 21.09,19.93 20.91,19.75 20.27,19.75 v20.14,19.89 | v22.27,21.26 21.47,21.26 21.3,21.43 20.77,21.43 20.24,20.9 v20.15,20.9 | 22.6,13.66 23.26,14.32 IC3.10 | 32.65,12.45 32.33,12.45 31.84,12.93 | v30.84,24.68 30.34,24.68 30.28,24.74 30.22,24.74 v29.73,25.23
  Bottom 0.3: 29.45,14.67 30.09,14.03 | 30.1,14.03 31.2,12.93 31.84,12.93 | v28.48,8.64 28.48,9.71 27.75,10.44 v27.75,10.6 | v25.49,16.55 26.54,15.5 26.54,14.79 25.4,13.65 25.4,13.53 25.84,13.09 25.96,13.09 v26.07,12.97 | 32.65,12.45 32.72,12.45 v33.28,11.88 | v37.48,25.51 37.83,25.86 v39.17,25.86 | v26.07,7.9 22.68,7.9 22.57,7.79 20.36,7.79 20.36,8.5 21.75,9.89 21.75,11.26 21.79,11.3 21.79,12.95 22.16,13.32 | 22.16,13.32 22.27,13.43 22.37,13.43 22.6,13.66 | v33.9,12.81 33.9,13.18 33.21,13.87 | v35.1,10.64 35.1,10.53 31.98,7.41 31.85,7.41 30.54,6.09 28.62,6.09 v28.54,6.02 | 33.21,13.87 33.42,13.87 33.18,14.11 v33.18,14.19 | 33.21,13.87 32.93,13.87 32.7,13.64 v32.52,13.64 | 22.16,13.32 21.72,13.32 v21.25,13.79
  other vias: 29.13,15.58 23.26,15.08
ALERT  (via drill 0.3)
  Top 0.15: U1.P$J24 32.25,19.58 32.87,18.95 34.85,18.95 35.03,19.14 35.92,19.14 v36.2,19.42 | v45.37,17.81 45.37,14.21 45.05,13.89 42.98,13.89 42.95,13.92 39.14,13.92 38.72,14.35 38.36,14.35 37.94,13.92 35.45,13.92 35.07,14.3 34.84,14.3 34.52,13.98 34.52,13.65 34.46,13.6 v34.46,13.38 | v31.69,12.42 31.62,12.36 30.95,12.36 29.67,11.07 29.67,10.02 | 29.67,10.02 | v29.67,9.86 29.67,10.02 | v22.25,11.05 v22.25,11.04 21.5,10.29 U3.5
  Bottom 0.15: v36.2,19.42 36.22,19.4 37.02,19.4 38.71,17.71 39.2,17.71 39.3,17.81 v45.37,17.81 | v31.69,12.42 32.65,11.45 34.04,11.45 34.41,11.82 34.41,13.33 v34.46,13.38 | v29.67,9.86 29.6,9.92 29.45,9.92 28.2,11.16 22.4,11.16 22.29,11.05 v22.25,11.05
D+  (via drill 0.3)
  Top 0.15: U1.P$AD6 27.13,14.84 v27.24,14.73 | v21.76,26.79 20.48,26.79 D3.4 | v36.86,14.35 37.13,14.35 37.81,15.03 38.74,15.03 39.44,15.73 39.44,16.73 38.74,17.43 37.72,17.43 37.55,17.6 v37.23,17.6 | v34.36,10.57 34.36,10.47 33.08,9.19 31.19,9.19 v31.17,9.17
  Bottom 0.15: v21.76,26.79 22.16,26.39 24.54,26.39 24.88,26.04 25.63,26.04 25.95,26.37 27.43,26.37 29.05,24.75 29.05,24.5 29.37,24.18 30,24.18 35.47,18.71 36.12,18.71 v37.23,17.6 | v36.86,14.35 36.84,14.33 36.68,14.33 35.51,13.16 35.51,11.89 34.36,10.74 v34.36,10.57 | v27.24,14.73 27.24,14.36 27.6,14 27.6,13.83 29.83,11.6 30.64,11.6 30.96,11.27 31.58,10.66 31.58,9.62 31.17,9.22 v31.17,9.17
D-  (via drill 0.3)
  Top 0.15: U1.P$AD4 26.63,14.47 v26.78,14.32 | v31.3,6.12 31.3,6.84 v30.05,8.09 | D3.6 20.74,24.63 v21.85,24.63 | v37.94,14.53 38.05,14.63 38.74,14.63 39.72,15.62 39.72,16.84 38.85,17.71 38.74,17.71 38.59,17.86 v37.95,17.86 | v35.68,10.7 35.57,10.59 35.57,10.46 32.58,7.47 v32.58,7.29 | v28.54,23.72 28.69,23.87 29.18,23.87 29.63,24.32 v29.63,24.61
  Bottom 0.15: 24.86,24.37 22.11,24.37 v21.85,24.63 | v37.94,14.53 37.91,14.53 37.31,13.92 36.66,13.92 35.79,13.04 35.79,10.89 35.68,10.78 v35.68,10.7 | v29.63,24.61 29.78,24.46 30.12,24.46 35.59,18.99 36.45,18.99 37.58,17.86 v37.95,17.86 | v30.05,8.09 v30.05,8.1 30.05,8.66 31.3,9.91 31.3,10.54 30.85,11 30.84,11 30.52,11.32 29.72,11.32 27.32,13.71 27.32,13.88 27.07,14.13 26.97,14.13 v26.78,14.32 | v32.58,7.29 32.47,7.29 v31.3,6.12 | 24.86,24.37 24.86,24.38 | 24.86,24.37 25.09,24.14 28.12,24.14 v28.54,23.72
DN
  Top 0.15: 23.44,24.93 D3.1 23.18,24.93 23.74,25.49 23.74,27.21 23.63,27.33 23.2,27.33 23.18,27.35 23.18,27.98 23.4,28.2 23.48,28.2 23.75,28.46 J4.B7 23.6,29.12 23.6,29.63 23.48,29.75 23.02,29.75 22.9,29.63 22.9,29.12 J4.A7
DP
  Top 0.15: J4.B6 22.4,28.83 22.4,27.94 22.5,27.83 22.88,27.83 | D3.3 22.88,26.82 22.88,27.83 | J4.A6 23.1,28.83 23.1,28.32 22.88,28.09 22.88,27.83
EPD_3V3  (via drill 0.3)
  Top 0.15: 25.84,11.92 EPD_C5.2 26.51,12.09 DMG2305UX-7.3 | J1.16 J1.15 10.77,16.4 11.53,16.4 11.8,16.67 13.77,16.67 13.84,16.6 | 13.84,16.44 13.84,16.6 13.2,17.24 13.2,17.57
  Top 0.3: 25.84,11.92 25.53,11.61 25.53,10.28 v25.72,10.09 25.55,10.26 C1-EP-DR.1 | v13.62,19.23 13.62,19.11 13.25,18.74 13.25,17.65 13.2,17.6 13.2,17.57 | 13.84,16.6 13.84,16.44 13.84,16.02 13.83,16.01 13.83,14.99 14.24,14.58 v14.27,14.58 | L5.2 14.49,28.71 9.92,28.71 v7.97,26.76 | v15.71,11.29 15.71,11 17.84,8.87 18.72,8.87 18.99,9.14 22.69,9.14 v22.82,9.01
  Bottom 0.3: v22.82,9.01 24.75,9.01 25.72,9.98 v25.72,10.09 | v13.62,19.23 12.84,20.02 12.84,21.66 10.99,23.51 10.99,23.74 v7.97,26.76 | v14.27,14.58 14.27,12.73 v15.71,11.29
EPD_BUSY  (via drill 0.3)
  Top 0.15: U1.P$AD12 28.63,15.43 28.9,15.16 28.9,15.07 v28.98,14.99 | J1.9 11.32,19.25 v11.54,19.46
  Bottom 0.15: v11.54,19.46 11.35,19.28 11.35,13.66 18.69,6.32 19.51,6.32 20.07,6.88 30.23,6.88 31.53,8.19 31.58,8.19 32.41,9.02 32.41,11 31.31,12.11 31.3,12.11 31.05,12.36 31.05,12.43 28.98,14.51 v28.98,14.99
EPD_CS  (via drill 0.2, 0.3)
  Top 0.15: v14.03,18.28 v14.03,17.4 | J1.12 12.16,17.75 v12.41,18
  Bottom 0.15: U1.P$K2 25.73,19.33 24.57,20.49 21.04,20.49 20.91,20.61 20.56,20.61 20.27,20.32 17.09,20.32 15.27,18.5 15.27,18.14 14.53,17.4 v14.03,17.4 | v14.03,18.28 13.91,18.28 13.62,18 v12.41,18
  other vias: 26.13,19.33
EPD_DC  (via drill 0.3)
  Top 0.15: U1.P$AD10 28.13,15.06 v28.1,15.03 v28.1,15.02 | J1.11 10.65,18.27 11.88,18.27 12.48,18.87 12.52,18.87 v12.75,19.1
  Bottom 0.15: v12.75,19.1 12.67,19.02 12.55,19.02 11.97,18.44 11.97,13.82 18.92,6.87 19.28,6.87 19.85,7.44 30,7.44 31.3,8.74 31.35,8.74 31.85,9.25 31.85,10.78 31.08,11.55 31.07,11.55 30.5,12.13 30.5,12.2 28.1,14.6 v28.1,15.02
EPD_RST  (via drill 0.2, 0.3)
  Top 0.15: J1.10 11.58,18.75 11.93,19.1 11.96,19.1 v12.14,19.28
  Bottom 0.15: U1.P$AC11 28.38,15.99 28.55,15.82 28.55,14.54 30.78,12.31 30.78,12.24 31.19,11.83 32.13,10.89 32.13,9.13 31.46,8.46 31.41,8.46 30.11,7.16 19.96,7.16 19.39,6.59 18.81,6.59 11.69,13.71 11.69,18.87 11.98,19.16 12.02,19.16 v12.14,19.28
  other vias: 28.38,16.08
GDR
  Top 0.3: Q3.1 16.61,22.75 15.91,22.75 15.29,23.37 13.65,23.38 | J1.2 10.7,22.82 11.48,22.82 12.17,23.51 12.55,23.51 12.68,23.38 13.65,23.38 | 13.65,23.38 13.63,23.4 13.52,23.4 13.36,23.56 13.36,23.74 R2_EP_DR.2
GND  (via drill 0.2, 0.3, 0.35)
  Top 0.15: IC1.D2 36.47,26.66 v37.05,26.08 | v38.01,27.36 37.36,28.01 v37.36,28.11 | J2.5 J2.3 39.83,8.83 38.96,7.96 38.96,5.01 TP_BAT_GND.TP | v36.19,28.87 37.06,29.74 TP_GND.TP | IC9.C3 IC9.C2 IC9.C1 IC9.B1 | U1.P$B7 27.38,20.93 U1.P$75 U1.P$74 28.93,18.88 30.38,20.33 U1.P$F23 | 30.44,14.66 C7.2 | U3.6 20.48,10.79 U3.9 | IC3.8 IC3.9 | v19.78,18.42 19.87,18.51 20.39,18.51 IC2.B1 | C38.2 23.41,11.2 C1-EP-DR.2 | C19.1 25.86,22.52 v26.1,22.28
  Top 0.3: J4.A1_B12 26.77,29.55 J4.SH3 | C39.2 26.01,27.82 v26.38,27.82 | C17.1 24.89,21.2 24.89,21.34 24.76,21.46 v24.76,21.5 | 28.93,18.88 28.93,18.78 U1.P$90 30.68,16.82 31.26,16.24 31.26,15.99 31.3,15.95 31.33,15.95 v31.34,15.96
  Bottom 0.15: v37.05,26.08 37.05,26.4 v38.01,27.36 | v37.36,28.11 36.6,28.87 v36.19,28.87 | IC2.B1 20.8,18.63 21.08,18.35 21.32,18.35 21.8,18.83 IC2.B3
  Bottom 0.3: v31.34,15.96 30.57,15.19 v30.38,15.19
  other vias: 35.94,25.89 30.6,4.77 19.86,4.64 13.69,14.31 19.57,21 33.54,18.39 14.73,18.97 21.94,27.54 33.66,27.05 22.97,12.16 14.33,23.88 13.75,20.9 13.21,15.42 13.63,13 26.11,25.67 29.34,9.36 27.17,10.52 18.43,10.52 17.42,10.64 24.59,14.56 23.81,15.95 36.49,4.09 20.8,18.92 21.8,18.92 19.46,17.04 33.93,21.97 32.75,22.49 28.08,26.92 29.57,25.81 22.01,25.82 22.91,21.16 40.58,21.8 33.8,19.68 30.42,23.14 29.94,23.64 22.46,11.79 22.51,9.75 22.51,12.92 23.82,21.85 23.42,9.48 24.49,9.5 24.13,27.16 19.79,28.01 32.64,17.64 31.08,13.7 43.71,24.19 42.7,31.3 35.67,32.92 11.17,33.82 5.28,32.72 2.08,25.81 2,9.17 2.39,4.4 7.1,1.15 9.12,7.49 17.77,0.82 27.96,0.87 38.17,1.06 43.58,4.65
  pour Top: 52.13,42.72 50.98,41.57 50.96,41.55 -2.32,41.55 -2.32,-6.55 43.29,-6.55 52.13,2.29
  pour Bottom: 49.59,40.18 48.44,39.03 48.42,39.01 -1.05,39.01 -1.05,-2.79 0.17,-4.01 43.29,-4.01 49.59,2.29
  pour Route2: -4.86,-7.91 45.74,-7.91 53.4,-0.25 53.4,43.18 -3.28,43.18 -4.86,41.6
HAPTIC_EN  (via drill 0.3)
  Top 0.15: IC2.A1 20.74,19.42 20.28,18.96 v20.08,18.96 | U1.P$U1 25.38,17.33 25.11,17.33 v25.07,17.38 | v24.16,17.39 24.16,17.48 23.82,17.82 23.56,17.82 v23.39,17.99
  Bottom 0.15: v24.16,17.39 25.05,17.39 v25.07,17.38 | v23.39,17.99 20.91,17.99 20.08,18.82 v20.08,18.96
IMU_INT1
  Top 0.15: U1.P$N1 25.6,18.56 25.6,18.52 24.59,17.5 24.59,17.21 24.29,16.91 IC3.5
IMU_INT2  (via drill 0.15, 0.3)
  Top 0.15: IC3.6 23.79,17.15 23.57,17.37 v23.54,17.37
  Bottom 0.15: U1.P$P2 26.07,18.33 25.55,17.81 23.98,17.81 v23.54,17.37 | v23.54,17.37
  other vias: 26.13,18.33
LX1
  Top 0.15: IC9.B2 IC9.B3 33.44,27.61 34.13,28.3 34.13,28.9 L7.1
LX2  (via drill 0.3)
  Top 0.15: IC9.D3 IC9.D2 32.67,26.72 33.29,26.72 v33.88,26.12 | L7.2 30.98,29.99 v30.98,28.36 | v29.57,27.18 30.45,26.3 v30.45,25.93
  Bottom 0.15: v30.45,25.93 30.47,25.91 33.59,25.91 33.8,26.12 v33.88,26.12 | v30.98,28.36 30.74,28.36 v29.57,27.18
MOSI  (via drill 0.2, 0.3)
  Top 0.15: J1.14 11.02,16.75 11.22,16.95 12.62,16.95 12.77,17.1 v12.77,17.15
  Bottom 0.15: v12.77,17.15 12.82,17.1 13.12,17.1 13.85,17.83 14.21,17.83 17.9,21.52 18.11,21.52 18.84,22.25 23.96,22.25 25.14,23.43 25.82,23.43 27.68,21.58 U1.P$B13
  other vias: 28.88,21.58
N$1
  Top 0.15: L2.2 L3.1
N$2
  Top 0.15: IC2.A2 20.97,19.75 20.66,19.75 20.34,19.43 19.79,19.43 19.72,19.36 C32.1
N$3
  Top 0.15: R9.2 35.1,25.9 35.1,25.94 35.13,25.97 IC1.D1
N$4
  Top 0.15: J4.B5 21.25,28.21 R2_USB.1
N$5
  Top 0.15: J4.A5 24.25,28.34 R1_USB.2
N$7
  Top 0.15: L5.1 16.15,24.66 Q3.3 18.69,22.07 17.64,21.02 17.64,20.97 17.36,20.69 16.83,20.69 16.47,20.33 16.47,20.12 C2-EP-DR.2 16.05,18.8 16.37,18.48 16.37,17.33 D5.2
N$8  (via drill 0.3)
  Top 0.15: R2.1 23.18,20.12 23.11,20.19 21.94,20.19 v21.12,21 | 29.31,23.43 29.14,23.26 28.51,23.26 28.48,23.29 26.02,23.29 25.73,23 v25.59,23 | IC9.E1 31.69,25.83 31.16,25.83 30.06,24.73 30.06,24.36 29.41,23.72 29.41,23.54 29.31,23.43 | v29.13,23.43 29.31,23.43
  Bottom 0.15: v21.12,21 21.36,20.76 23.37,20.76 25.59,22.98 v25.59,23
N$9
  Top 0.15: R4.1 32.14,26.9 32.18,26.9 IC9.D1
N$10
  Top 0.15: IC3.1 24.88,15.01 R3.1
N$11
  Top 0.15: J1.4 12.29,21.75 EPD_C2.2
N$12
  Top 0.15: EPD_C1.2 12.03,20.13 10.91,21.25 J1.5
N$14
  Top 0.15: C2-EP-DR.1 17.35,18.92 17.55,18.72 17.55,18.67 18.39,17.82 D4.2 18.46,16.52 19.34,15.65 19.34,15.6 19.15,15.41 19.15,15.22 18.71,14.78 17.44,14.78 D2.1
N$16
  Top 0.15: U1.P$N24 32.17,18.62 C9.1
N$19
  Top 0.15: U1.P$H23 31.95,19.83 32,19.88 32.53,19.88 C3.1 32.95,19.69 32.96,19.44 33.17,19.23 33.98,19.23 L4.1
N$20  (via drill 0.35)
  Top 0.15: L4.2 36.62,20.08 36.71,19.99 37.37,19.99 v37.62,20.24 | C4.1 v39.91,19.99 | C4.1 40.48,20.71 40.02,21.18 C22.1 | C4.1 41.31,20.04 ANT1.1
  Bottom 0.15: v37.62,20.24 37.62,20.66 37.77,20.81 39.09,20.81 v39.91,19.99
N$21
  Top 0.15: U1.P$D23 31.91,20.83 32.09,21.02 32.91,21.02 33.28,21.38 C11.2
N$22
  Top 0.15: X1.1 34.11,23.07 33.12,22.08 33.12,22.04 C1.1 32.69,21.62 32.58,21.62 32.54,21.58 U1.P$B24
N$23
  Top 0.15: U1.P$A23 31.66,22.12 C2.1 31.89,22.94 31.89,22.98 32.01,23.09 32.42,23.09 32.53,22.99 33.33,22.99 33.96,23.62 33.96,24.73 34.09,24.85 35.47,24.85 X1.3
N$24  (via drill 0.3)
  Top 0.15: 33.53,20.59 | C15.1 C16.2 34.2,20.98 34.2,20.95 33.74,20.95 33.62,20.83 33.62,20.68 33.53,20.59 | U1.P$B5 26.88,22.25 L3.2 27.62,22.98 29.21,22.98 v29.35,22.84 | C10.2 33.39,20.55 | 33.53,20.59 33.52,20.57 C10.2 | C10.2 33.18,20.36 v32.74,20.36 32.52,20.58 U1.P$E24
  Bottom 0.15: v32.74,20.36 31.85,20.36 29.37,22.84 v29.35,22.84
N$25
  Top 0.15: EPD_C6.2 12.13,15.97 10.91,14.75 J1.18
N$26
  Top 0.15: J1.19 11.57,14.25 EPD_C7.2
N$27
  Top 0.15: J1.20 12.01,13.75 EPD_C8.2
N$28
  Top 0.15: U1.P$A18 29.88,22.33 C13.2
N$29  (via drill 0.3)
  Top 0.15: R_TYPE_SEL.2 15.19,21.65 | R1_EP_DR.1 14.71,22.25 R_TYPE_SEL.2 | R_TYPE_SEL.2 15.23,21.72 v14.62,21.72 | SJ1.2 11.49,25.23 v11.49,23.71
  Bottom 0.15: v11.49,23.71 11.58,23.8 11.58,24.19 11.83,24.45 12.19,24.45 14.62,22.01 v14.62,21.72
N$30
  Top 0.15: J1.22 11.48,12.75 EPD_C10.2
N$32
  Top 0.15: J1.24 11.19,11.75 EPD_C12.2
N$40
  Top 0.15: 26.5,22.87 26.5,22.52 | 26.5,22.52 26.5,21.71 U1.P$B3 | 26.5,22.52 26.45,22.57 L2.1
N$41
  Top 0.15: U1.P$C1 25.28,21.43 25.28,21.54 24.83,21.99 C5.2
N$42
  Top 0.15: X2.2 23,22.05 23.62,21.43 23.95,21.43 24.32,21.05 C17.2 24.48,20.91 24.73,20.67 25.64,20.67 25.8,20.83 U1.P$D2
N$43
  Top 0.15: U1.P$F2 25.8,20.33 25.75,20.38 25.38,20.38 25.17,20.18 24.86,20.18 24.84,20.21 24.65,20.21 24.43,20.43 23.98,20.88 C18.2 23.9,20.84 23.56,20.5 22.42,20.5 21.84,21.09 X2.1
N$56  (via drill 0.3)
  Top 0.15: v25.51,15.53 26.01,16.03 26.25,16.03 26.3,16.08 U1.P$AC5 | 24.95,13.73 C20.1 25.18,14.13 25.39,14.13 25.57,14.13 25.68,14.25 25.68,14.44 25.99,14.75 25.99,14.85 v25.86,14.98
  Bottom 0.15: v25.51,15.53 25.86,15.18 v25.86,14.98
OUT+  (via drill 0.3)
  Top 0.15: IC2.A3 21.89,19.42 22.26,19.05 22.26,17.59 v22.07,17.4 | 13.71,18.63 13.6,18.52 13.6,17.23 13.88,16.95 13.99,16.95 14.17,16.77 v14.66,16.77 | 13.71,18.64 13.71,18.63 | v11.74,28.21 11.74,26.65 12.07,26.32 12.07,24.07 v12.01,24.02 | 13.71,18.63 14.45,19.36 14.52,19.36 14.65,19.49 v14.65,20.79 | v11.71,29.31 11.71,29.47 12.2,29.96 12.2,31.35 12.91,32.05 13.9,32.05 14.33,31.63 TP_OP.TP
  Bottom 0.15: v22.07,17.4 22.77,16.7 22.77,16.31 22.05,15.59 20.17,15.59 17.49,18.27 16.4,18.27 14.9,16.77 v14.66,16.77 | v11.74,28.21 11.74,29.28 v11.71,29.31 | v14.65,20.79 14.65,21.09 14.19,21.55 14.19,21.77 12.01,23.95 v12.01,24.02
OUT-  (via drill 0.3)
  Top 0.15: TP_ON.TP 18.13,6.6 18.83,7.3 v19.1,7.3 | IC2.C3 21.57,18.19 21.57,16.34 21.43,16.2 21.43,15.83 21.6,15.66 21.6,15.14 21.68,15.06 21.68,13.09 v21.29,12.7
  Bottom 0.15: v21.29,12.7 21.29,9.93 19.58,8.22 19.58,8.02 19.33,7.77 19.3,7.77 19.1,7.57 v19.1,7.3
P0.13  (via drill 0.3)
  Top 0.15: SW_UP.2 C30.2 31.37,5.58 31.78,5.99 31.78,6.99 30.1,8.67 30.1,10.77 30.13,10.8 v30.13,10.86 | 27.37,13.69 27.37,13.44 R5.1 | 27.37,13.69 26.91,13.69 v26.9,13.71 | 27.37,13.69 27.47,13.79 27.47,14.36 27.67,14.55 27.67,14.91 27.63,14.95 U1.P$AD8
  Bottom 0.15: v26.9,13.71 29.74,10.86 v30.13,10.86
P0.14  (via drill 0.15, 0.3)
  Top 0.15: C31.2 20.38,3.82 SW_ENT.2 22.1,4.32 22.1,4.72 26.36,8.99 27.63,8.99 28.03,9.38 28.03,10.25 28.43,10.65 29.26,10.65 29.38,10.77 29.38,11.38 v30.01,12.01 v30.01,12.03 | R8.1 27.96,13.96 v28.05,14.05
  Bottom 0.15: U1.P$AC9 27.67,15.87 27.67,14.57 | 27.67,14.57 28.14,14.1 28.14,13.89 v30.01,12.03 | 27.67,14.57 27.67,14.42 v28.05,14.05
  other vias: 27.88,16.08
P1.01  (via drill 0.3)
  Top 0.15: U1.P$Y23 31.83,16.63 31.83,15.96 32.21,15.57 v32.21,15.47 | DMG2305UX-7.1 28.73,11.34 30.09,12.71 31.37,12.71 31.62,12.96 32.44,12.96 32.94,13.46 32.94,13.82 32.63,14.13 32.63,14.57 32.38,14.57 R_PWR_EPD.1 32.72,14.79 v32.79,14.87
  Bottom 0.15: v32.79,14.87 32.79,14.91 32.27,15.43 32.25,15.43 v32.21,15.47
P1.02  (via drill 0.3)
  Top 0.15: C29.2 9.33,3.97 SW_DN.2 11.1,4.47 11.1,4.75 12.69,6.35 13.86,6.35 14.56,7.05 14.56,7.56 15.45,8.45 19.08,8.45 19.12,8.41 23.93,8.41 24.05,8.29 24.89,8.29 v25.05,8.45 | v26.53,8.55 26.69,8.71 27.75,8.71 28.11,9.07 28.98,9.07 29.1,8.95 v29.1,7.87 | U1.P$W24 32.36,17.08 32.48,17.21 32.84,17.21 32.95,17.09 R7.1 33.61,16.87 33.65,16.87 33.77,16.75 33.77,13.89 30.44,10.57 30.44,9.89 v30.52,9.81
  Bottom 0.15: v26.53,8.55 25.15,8.55 v25.05,8.45 | v29.1,7.87 29.1,8.09 30.48,9.47 30.48,9.76 v30.52,9.81
PMIC_INT  (via drill 0.2, 0.3)
  Top 0.15: v35.5,28.56 35.13,28.19 IC1.A1 | v29.53,29.05 29.13,29.05 29.05,28.97 28.52,28.97 27.75,28.2 25.45,28.2 24.99,27.73 24.99,26.58 24.37,25.97 v24.37,25.95 | v17.18,17.84 17.18,18.7 16.75,19.13 16.75,20.21 16.89,20.35 17.42,20.35 17.92,20.86 17.92,20.91 18.63,21.62 19.35,21.62 19.47,21.74 19.47,22.4 19.03,22.84 18.46,22.84 18.21,23.09 18.21,24.44 18.34,24.57 19.62,24.57 19.98,24.2 24.23,24.2 24.73,24.7 v25.25,24.7
  Bottom 0.15: U1.P$T2 24.7,16.4 23.25,16.4 22.16,15.31 19.92,15.31 17.39,17.84 v17.18,17.84 | v29.53,29.05 29.8,28.79 31.16,28.79 31.22,28.72 35.34,28.72 v35.5,28.56 | v24.37,25.95 24.47,25.85 24.68,25.85 24.76,25.76 25.28,25.76 25.36,25.68 25.36,24.82 v25.25,24.7
  other vias: 26.13,17.83
PREVGH
  Top 0.15: D5.1 14.69,14.77 15.02,14.44 15.02,13.43 EPD_C9.2 13.79,13.38 13.47,13.38 13.35,13.25 J1.21
PREVGL
  Top 0.15: D2.2 18.15,11.99 16.62,11.99 16.52,11.89 EPD_C11.2 13.61,11.89 13.09,11.38 12.02,11.38 11.15,12.25 J1.23
RESE
  Top 0.3: Q3.2 16.61,21.45 16.61,21.58 16,22.19 15.93,22.27 15.33,22.27 14.95,22.65 14.81,22.65 R1_EP_DR.2 12.73,22.79 12.37,22.43 11.87,22.43 11.76,22.32 10.7,22.32 J1.3
RESET  (via drill 0.2, 0.3)
  Top 0.15: J2.6 41.1,10.93 41.96,11.8 41.96,13.01 v42.31,13.36 | TP_RESET.TP 38.21,16.2 v36.73,16.2
  Bottom 0.15: v42.31,13.36 41.64,13.36 41.08,13.92 41.01,13.92 38.98,15.95 36.73,15.95 | 36.73,15.95 36.73,15.93 36.62,16.04 34.62,16.04 34.32,16.34 29.13,16.34 U1.P$AC13 | 36.73,15.95 v36.73,16.2
  other vias: 28.88,16.08
SCK  (via drill 0.3)
  Top 0.15: U1.P$A12 28.63,22.54 v28.65,22.56 | J1.13 12.27,17.25 12.6,17.58 12.63,17.58 12.9,17.84 12.9,18.32 v12.74,18.48
  Bottom 0.15: v28.65,22.56 28.61,22.6 27.05,22.6 25.94,23.71 25,23.71 23.82,22.53 18.73,22.53 17.99,21.8 17.6,21.8 15.3,19.5 14.58,19.5 13.57,18.48 v12.74,18.48
SCL  (via drill 0.15, 0.3)
  Top 0.15: 23.36,19.51 R17.2 | v31.76,27.43 31.74,27.45 R4.2 30.95,27.45 v30.44,26.94 | v24.14,18.24 24.14,18.47 23.34,19.27 R17.2 | R17.2 23.34,19.57 23,19.91 22.58,19.91 22.44,19.77 22.44,19.27 22.54,19.16 22.54,16.58 22.35,16.39 | v18.68,23.29 19.24,23.29 v19.48,23.05 19.8,22.73 19.8,21.45 19.92,21.32 20.33,21.32 20.58,21.07 20.58,20.34 v20.73,20.18 | TP_SCL.TP 13.48,30.85 14.25,30.08 17.64,30.08 17.89,29.83 17.89,29.22 17.94,29.18 17.94,26.47 v17.99,26.42 | 23.88,14.65 23.99,14.65 23.92,14.57 23.92,14.52 24.03,14.41 24.03,13.18 23.92,13.07 23.23,13.07 23.07,12.92 23.07,12.86 22.66,12.46 22.3,12.46 21.83,11.99 21.83,11.55 21.57,11.29 U3.7 | 23.88,14.65 22.98,14.65 22.46,15.17 22.46,16.2 22.31,16.35 22.35,16.39 | 22.35,16.39 v22.27,16.46 | IC1.B1 34.41,27.46 34.39,27.48 34.16,27.48 v34.16,27.49 | v29.78,26.3 29.5,26.3 29.28,26.52 26.93,26.52 26.8,26.39 26.8,25.72 26.77,25.69 26.77,25.31 26.29,24.82 26.01,24.82 25.1,23.92 v24.6,23.92 | IC3.12 24.14,14.91 24.14,14.8 24.02,14.68 23.91,14.68 23.88,14.65 | IC2.C1 20.71,18.42 v20.29,18
  Bottom 0.15: U1.P$M2 25.75,18.83 | 25.75,18.83 25.35,18.83 24.79,18.27 24.16,18.27 v24.14,18.24 | v17.99,26.42 17.99,23.73 17.27,23.02 17.27,22.32 17.52,22.07 17.88,22.07 18.13,22.32 18.13,22.74 v18.68,23.29 | v31.76,27.43 33.44,27.43 33.49,27.49 v34.16,27.49 | v30.44,26.94 29.8,26.3 v29.78,26.3 | v22.27,16.46 21.03,17.71 20.79,17.71 20.5,18 v20.29,18 | v24.6,23.92 23.73,23.05 v19.48,23.05 | 25.75,18.83 24.38,20.2 20.76,20.2 v20.73,20.18
  other vias: 26.13,18.83
SDA  (via drill 0.2, 0.3)
  Top 0.15: U1.P$L1 25.3,18.75 25.22,18.83 25.22,19.47 25,19.69 24.18,19.69 v23.97,19.48 | IC3.2 24.3,15.58 v24.28,15.6 | U1.P$L1 25.58,19.08 R18.2 | v17.98,18.84 18.11,18.98 18.11,19.79 18.23,19.91 19.48,19.91 19.5,19.89 v19.53,19.89 | v17.7,22.5 17.37,22.17 17.37,21.09 17.25,20.97 16.23,20.97 15.62,20.35 15.59,20.35 15.45,20.21 15.45,19.01 15.85,18.6 v15.85,18.38 | IC1.C1 35.02,27.06 v34.43,26.47 | TP_SDA.TP 28.87,32.51 v28.87,29.4 | v21.86,16.02 21.86,16 22.03,15.83 22.03,15.21 22.5,14.73 v22.5,14.52 22.5,13.57 21.98,13.06 21.98,12.56 U3.8 | 26.48,26.61 26.48,26.85 | 26.48,26.61 26.49,26.62 26.49,26.69 v26.65,26.85 | 26.48,26.61 26.52,26.57 26.52,25.83 26.48,25.79 26.48,25.51 26.11,25.14 v24.3,25.14 | U1.P$L1 24.81,19.9 24.56,19.9 24.34,20.12 R2.2
  Bottom 0.15: 21.95,19.65 21.3,19 IC2.B2 | v23.97,19.48 23.79,19.65 21.95,19.65 | 21.95,19.65 21.38,19.65 21.19,19.46 19.94,19.46 19.71,19.23 19.71,19.34 | 19.71,19.34 19.6,19.23 19.6,19.07 19.23,19.07 19.23,18.25 21.46,16.02 v21.86,16.02 | 19.71,19.34 19.71,19.68 19.53,19.86 v19.53,19.89 | v17.98,18.84 16.23,18.84 15.85,18.47 v15.85,18.38 | v17.7,22.5 17.7,23.05 19.79,25.14 v24.3,25.14 | 28.8,29.16 28.8,29.47 v28.87,29.4 | 28.8,29.16 28.8,27.2 29.27,26.73 29.83,26.73 30.01,26.91 30.01,27.13 30.68,27.8 30.74,27.8 31.99,26.55 34.14,26.55 34.22,26.47 v34.43,26.47 | v24.28,15.6 24.18,15.5 23.09,15.5 22.83,15.25 22.83,14.85 v22.5,14.52 | 28.8,29.16 28.38,28.74 28.38,28.61 26.65,26.88 v26.65,26.85
  other vias: 21.3,18.92
SWDCLK  (via drill 0.3)
  Top 0.15: J2.4 38.79,11.55 38.79,13.04 38.54,13.29 v38.54,13.92 | v36.7,15.39 36.7,15.62 35.71,16.61 TP_SWDCLK.TP 34.79,16.59 v34.79,16.47 | v32.66,16.78 32.46,16.58 U1.P$AA24
  Bottom 0.15: v36.7,15.39 39.15,15.39 39.74,14.8 39.74,14.04 38.66,14.04 v38.54,13.92 | v32.66,16.78 32.77,16.78 33.02,17.03 34.32,17.03 34.79,16.56 v34.79,16.47
SWDIO  (via drill 0.3, 0.35)
  Top 0.15: v32.69,15.81 32.48,15.81 32.2,16.08 U1.P$AC24 | v34.95,13.81 34.98,13.78 34.98,12.6 36.66,10.92 38.15,10.92 J2.2 38.99,10.52 39.58,9.92 42.54,9.92 43.17,10.56 43.17,11.34 43.48,11.64 43.48,13.12 v43.28,13.32 | v43.17,14.34 41.96,15.55 TP_SWDIO.TP
  Bottom 0.15: v32.69,15.81 34.21,15.81 34.25,15.77 34.43,15.77 34.95,15.25 v34.95,13.81 | v43.28,13.32 43.28,14.23 v43.17,14.34
SWO  (via drill 0.3)
  Top 0.15: U1.P$AD22 31.09,15.54 v31.09,14.9 | TP_SWO.TP 32.59,10.46 33.89,11.77 v33.89,11.91
  Bottom 0.15: v33.89,11.91 33.89,12.21 33.3,12.8 32.75,12.8 31.09,14.46 v31.09,14.9
VBAT  (via drill 0.3)
  Top 0.15: IC1.C2 36.97,27.06
  Top 0.3: v39.19,14.48 39.19,14.59 40.07,15.47 40.07,16.99 38.97,18.09 v38.97,18.14 | v15.35,7.49 16.07,6.77 16.07,6.07 16.82,5.32 17.88,5.32 18.93,6.37 v21.23,6.37 19.58,8.02 v18.9,8.02 | v14.47,8.49 13.53,7.55 TP_VBAT.TP | U3.3 U3.2 19.16,11.38 18.77,11.38 18.71,11.43 C37.1 17.98,11.41 C27.1 17.98,9.91 v18.51,9.37 | v38.75,19.62 38.18,20.19 38.18,25.85 36.97,27.06
  Bottom 0.15: 30.46,6.52 30.35,6.52 | 32.83,9.82 32.83,9.75
  Bottom 0.3: v21.23,6.37 21.38,6.52 30.35,6.52 30.36,6.52 31.68,7.84 31.72,7.84 32.76,8.87 32.76,9.68 32.83,9.75 35.16,12.07 35.16,13.3 35.49,13.63 35.49,13.69 36.65,14.85 36.87,14.85 37.06,15.04 38.63,15.04 v39.19,14.48 | v15.35,7.49 14.47,8.37 v14.47,8.49 | v38.97,18.14 38.97,19.38 38.75,19.6 v38.75,19.62 | v18.51,9.37 18.9,8.98 v18.9,8.02
VBUS  (via drill 0.3, 0.35)
  Top 0.15: 24.04,10.82 24.04,9.02 C42.1 24.04,8.9 24.04,8.68 24.16,8.56 24.47,8.56 25.23,9.32 25.41,9.32 | U1.P$AD2 26.29,15.42 26.29,13.96 26.08,13.75 | 36.71,28.05 35.72,28.05 IC1.A2 36.12,28.44 36.37,28.44 36.46,28.54 37.77,28.54 38.47,29.24 38.47,30.32 38.64,30.49 37.39,31.74 30.7,31.74 29.51,30.54 v29.51,29.93 | J4.A4_B9 25.1,28.68 25.1,28.32 24.55,27.76 v24.55,26.83
  Top 0.3: C43.1 26.9,9.34 25.43,9.34 25.41,9.32 | D3.5 20.25,25.69 20,25.69 19.57,26.12 19.57,27.4 19.57,27.41 20.39,27.41 20.6,27.61 J4.A9_B4 20.82,29.2 20.82,29.66 21.3,30.15 24.7,30.15 25.18,29.66 25.18,29.2 J4.A4_B9 | 24.04,10.82 24.04,11.32 23.99,11.38 C38.1 23.96,11.39 C21.1 24.98,12.66 25.74,13.42 25.74,13.75 26.08,13.75 v26.15,13.69 | 36.71,28.05 37.51,27.25 37.51,27.15 38.64,26.02 38.64,20.99 38.61,20.96 38.61,20.58 38.87,20.32 38.94,20.32 v39.02,20.24 | v39.62,18.59 39.23,18.59 39.18,18.64 38.53,18.64 38.43,18.54 37.71,18.54 37.39,18.21 36.81,18.21 36.24,18.78 35.18,18.78 34.12,17.72 34.12,13.75 30.87,10.5 v30.87,10.35
  Bottom 0.15: v29.51,29.93 28.8,29.93 28.11,29.24 28.11,28.73 26.96,27.58 26.77,27.58 26.02,26.83 v24.55,26.83 | v30.87,10.35 v30.86,10.36 | v24.55,26.83
  Bottom 0.3: v30.86,10.36 29.51,10.36 26.68,13.19 | v39.62,18.59 39.48,18.73 39.48,19.6 38.96,20.12 38.96,20.18 v39.02,20.24 | 26.68,13.22 26.68,13.19 | 26.68,13.19 26.65,13.19 v26.15,13.69
VREG  (via drill 0.3)
  Top 0.15: 31.42,28.02 31.43,28.01 IC9.A1 IC9.A2 IC9.A3 33.23,28.01 v33.5,28.28 | 28.61,28.2 28.2,28.2 C24.1 26.62,27.43 C39.1 25.62,26.25 25.15,25.78 25.15,25.74 C23.2
  Top 0.3: v36.42,27.58 36.3,27.46 IC1.B2 | 31.42,28.02 | 31.42,28.02 31.25,27.85 30.71,27.85 30.36,28.2 28.61,28.2 | 31.42,28.02 32.14,28.74 32.14,31.23 32.3,31.39 33.73,31.39 33.89,31.23 33.89,31.12 TP_VREG.TP
  Bottom 0.3: v36.42,27.58 v36.42,27.59 36,28.01 34.29,28.01 34.13,28.17 33.61,28.17 v33.5,28.28